# Altium PCB PCB2.PcbDoc
Units mm, origin at the board's own origin, x right, y up, seen from the top; angles counter-clockwise.
Board outline 92.48 x 112 mm, 2 copper layers (Top Layer, Bottom Layer); 8 components, 6 nets, 40 pads, 28 vias.
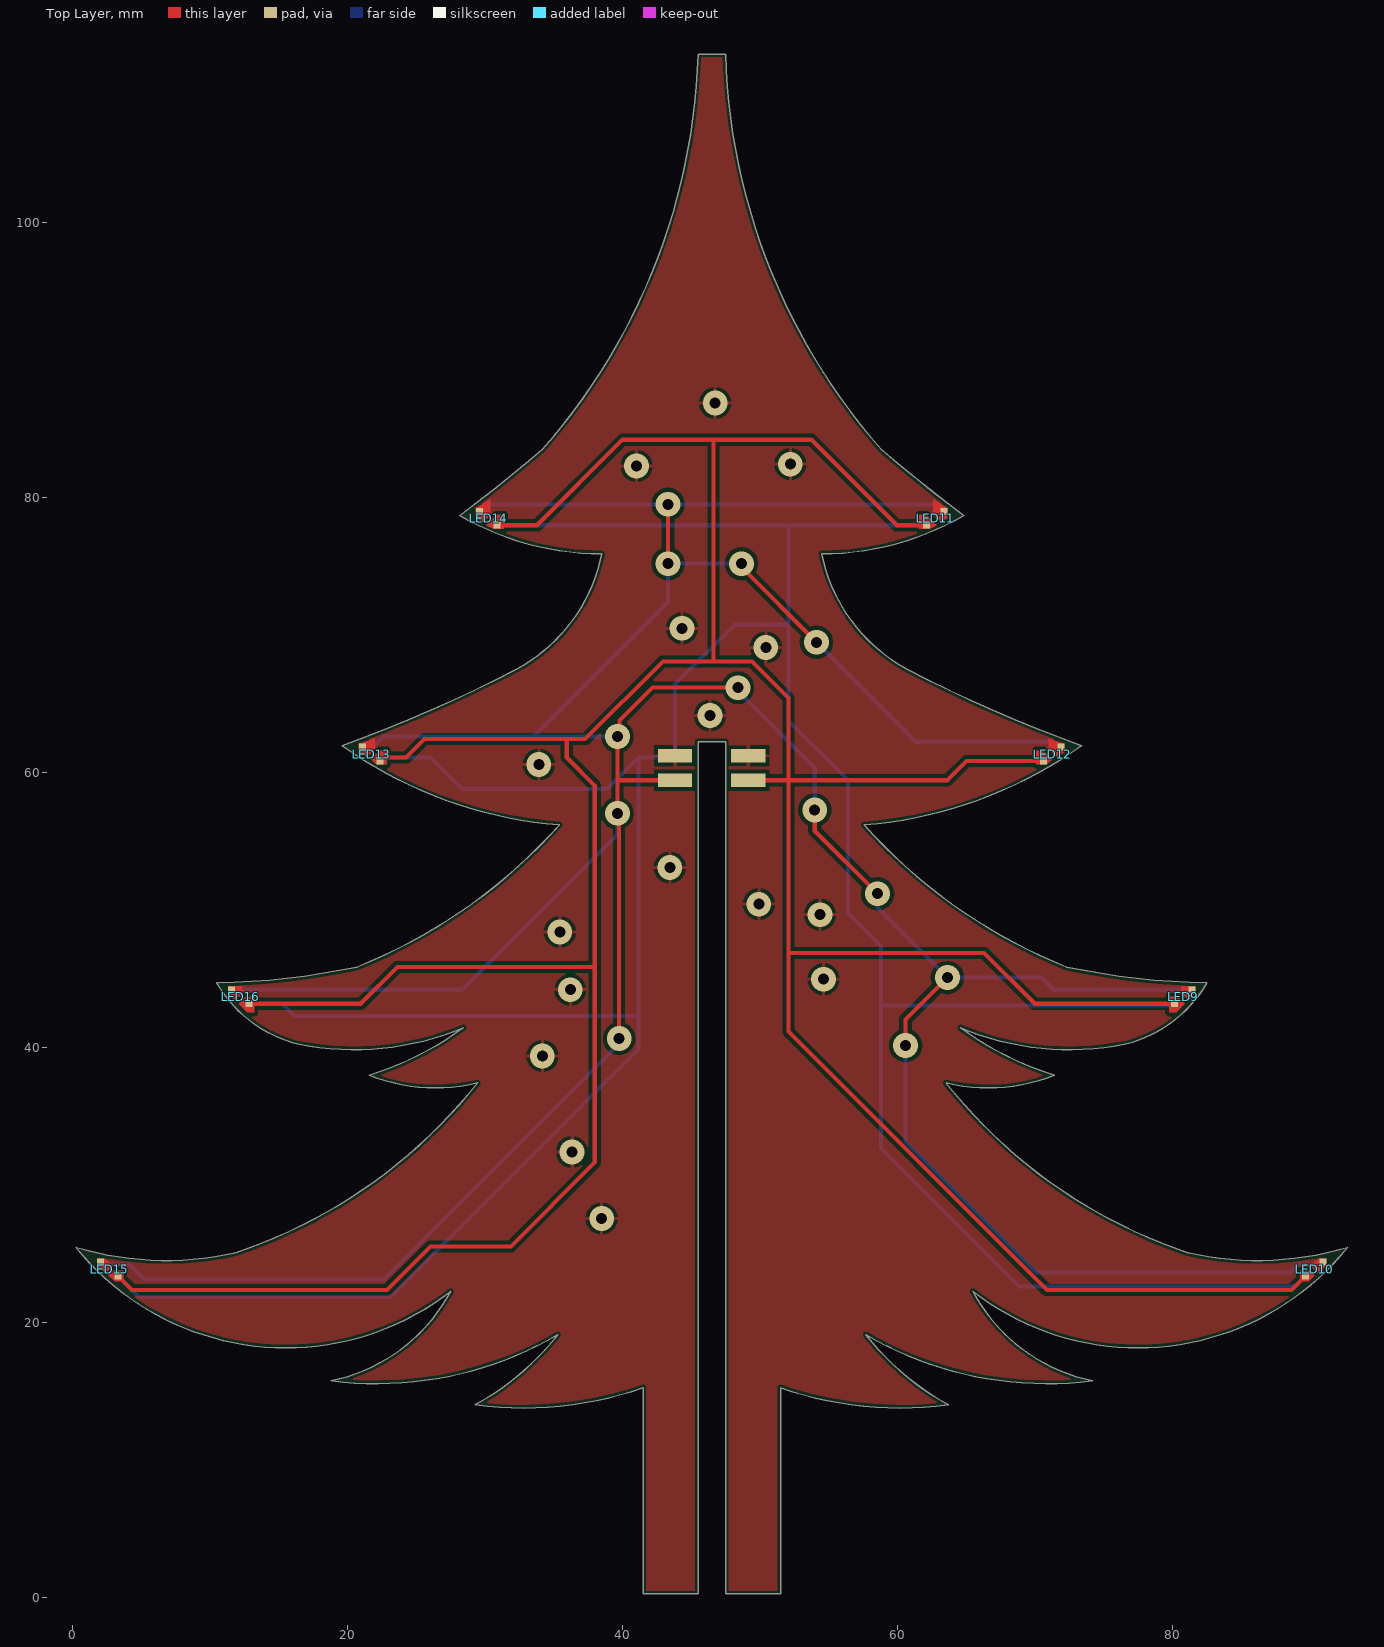
[diagram p0: Top Layer view]
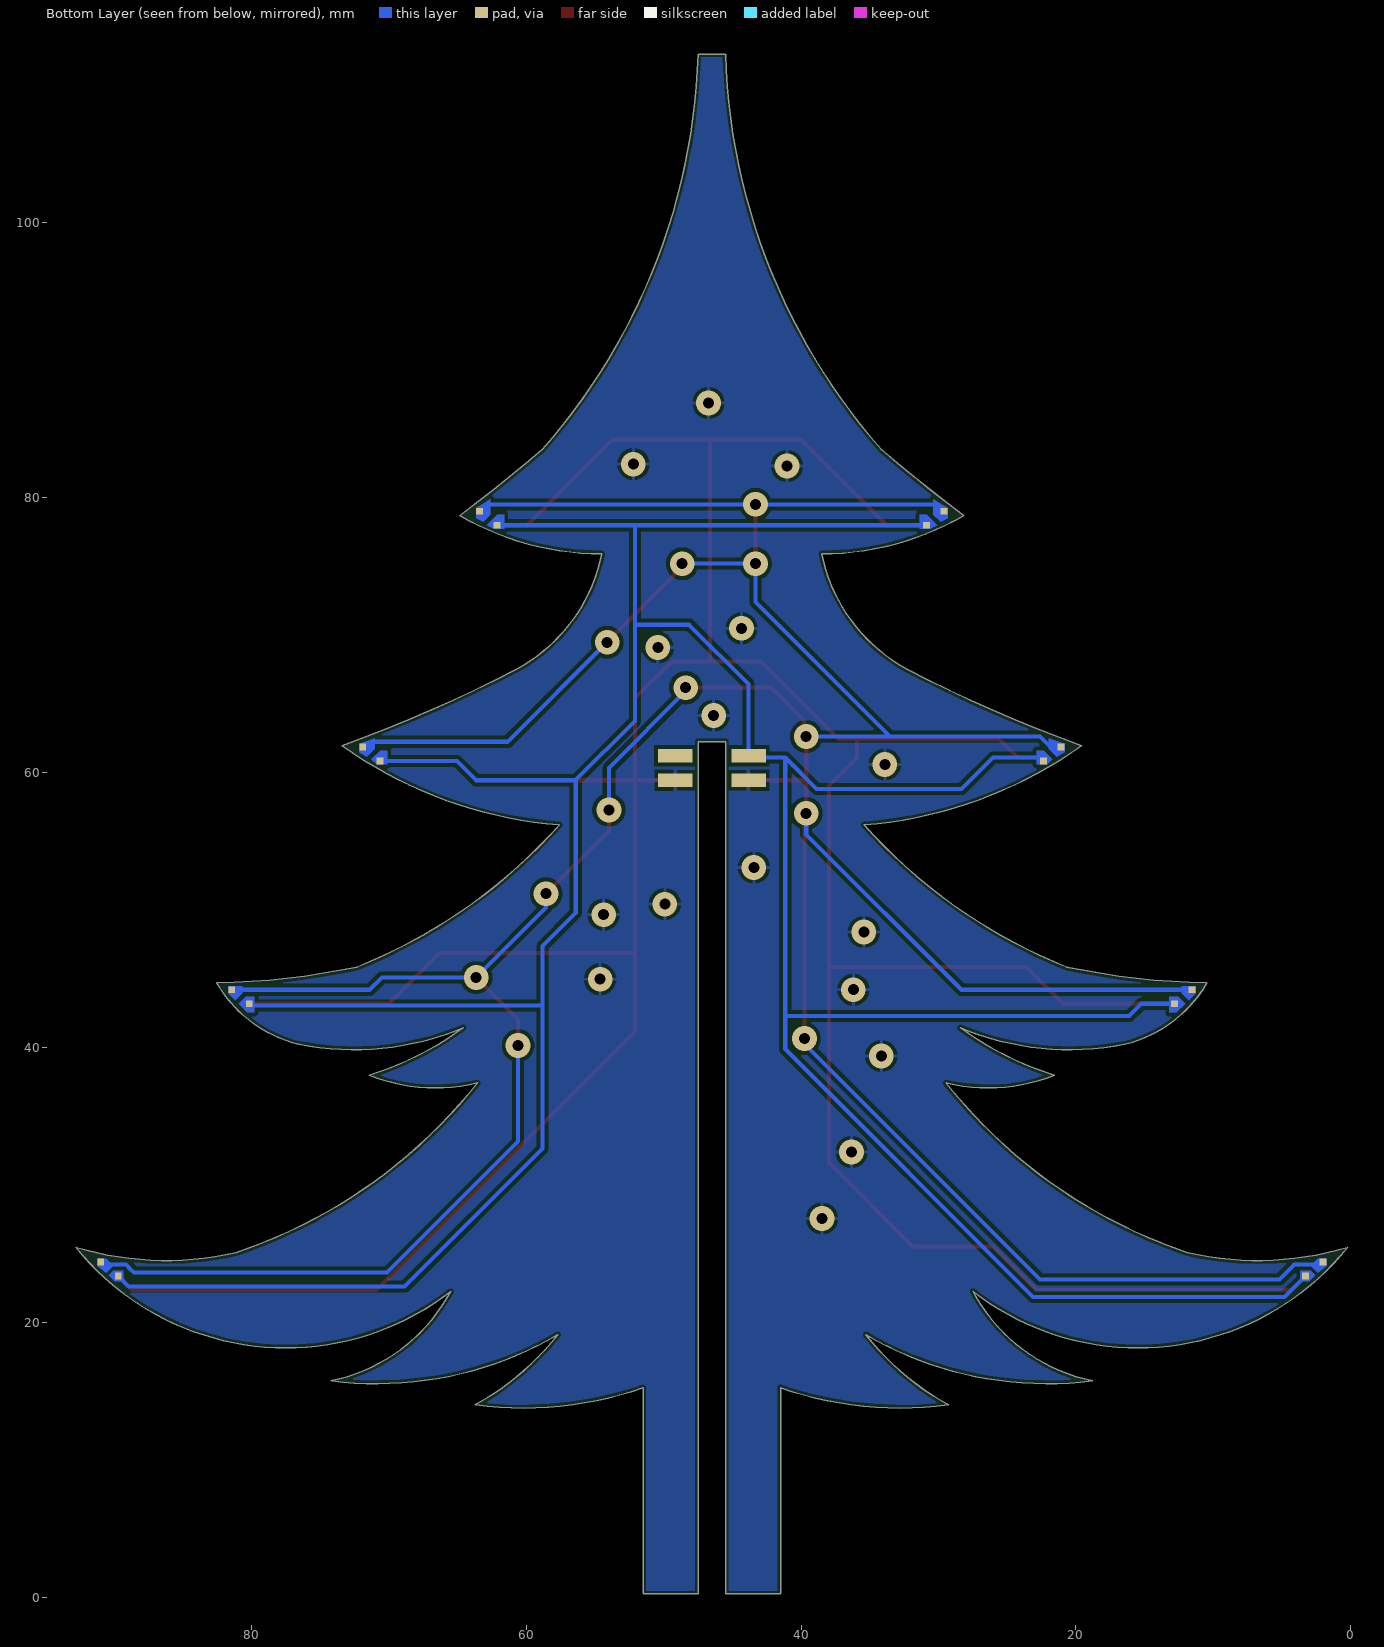
[diagram p1: Bottom Layer view, seen from below]

## Layer stack, top to bottom
Top Solder: solder mask 0.0102, Solder Resist, Dk 3.5
Top Layer: signal copper 0.0356
Dielectric 1: dielectric 0.32, FR-4, Dk 4.8
Bottom Layer: signal copper 0.0356
Bottom Solder: solder mask 0.0102, Solder Resist, Dk 3.5

## Board outline
0.25,25.447 ccw(c15.498,37.72) 27.489,22.25 cw(c16.226,28.246) 18.796,15.748 ccw(c22.107,41.683) 35.283,19.1 cw(c19.672,31.397) 29.274,13.998 ccw(c32.778,40.023) 41.489,15.25 41.489,0.25 45.489,0.25 45.489,62.25 47.489,62.25 47.489,0.25 51.489,0.25 51.489,15.25 ccw(c60.2,40.023) 63.705,13.998 cw(c73.306,31.397) 57.695,19.1 ccw(c70.872,41.683) 74.182,15.748 cw(c76.752,28.246) 65.489,22.25 ccw(c77.481,37.72) 92.728,25.447 cw(c86.204,47.36) 81.094,25.074 cw(c93.095,60.815) 63.53,37.42 ccw(c66.581,50.077) 71.408,37.985 cw(c78.121,59.804) 64.567,41.435 ccw(c72.507,60.239) 76.496,40.221 ccw(c74.275,49.473) 82.498,44.687 cw(c83.69,100.647) 72.293,45.847 cw(c86.914,82.315) 57.574,56.183 ccw(c55.084,87.548) 73.382,61.953 cw(c108.223,158.773) 60.7,67.506 cw(c66.556,78.334) 54.49,75.898 ccw(c54.435,96.629) 64.814,78.684 cw(c135.275,172.701) 58.825,83.486 cw(c92.91,113.534) 47.489,112.25 45.489,112.25 cw(c0.068,113.534) 34.154,83.486 cw(c-42.296,172.7) 28.164,78.684 ccw(c38.543,96.629) 38.488,75.898 cw(c26.422,78.334) 32.278,67.506 cw(c-15.244,158.773) 19.596,61.953 ccw(c37.894,87.548) 35.405,56.183 cw(c6.064,82.315) 20.685,45.847 cw(c9.289,100.646) 10.48,44.687 ccw(c18.703,49.473) 16.482,40.221 ccw(c20.471,60.239) 28.411,41.435 cw(c14.857,59.803) 21.571,37.985 ccw(c26.398,50.077) 29.448,37.42 cw(c-0.116,60.815) 11.884,25.074 cw(c6.774,47.36)

## Design rules (kind name [scope] priority, off if disabled: settings)
BoardOutlineClearance [All] p1: gap=0.24 ignorepadtopadclearanceinfootprint=FALSE
Clearance [All] p1: gap=0.3 ignorepadtopadclearanceinfootprint=FALSE
PolygonConnect [All] p1: connectstyle=Relief reliefconductorwidth=0.254 reliefentries=4 polygonreliefangle="90 Angle" airgapwidth=0.254
RoutingVias [All] p1: holewidth=0.8 width=1.8 viastyle="Through Hole" minholewidth=0.8 minwidth=1.8 maxholewidth=0.8 maxwidth=1.8
SolderMaskExpansion [All] p1: expansion=0.102 istentingtop=FALSE
Width [All] p1: maxlimit=1 minlimit=0.3 preferedwidth=0.5
30 further rules are at their usual default settings.

## Components (designator, comment, footprint, x,y, rotation, side; value= is the part's Value field where it differs from the comment)
LED9 "1010" LED_RGB_2_LAYERS#1 81.407,44.196 r180 top
LED10 "1010" LED_RGB_2_LAYERS#1 90.932,24.384 r180 top
LED11 "1010" LED_RGB_2_LAYERS#1 63.373,78.994 r180 top
LED12 "1010" LED_RGB_2_LAYERS#1 71.882,61.849 r180 top
LED13 "1010" LED_RGB_2_LAYERS#2 21.082,61.849 r0 top
LED14 "1010" LED_RGB_2_LAYERS#2 29.591,78.994 r0 top
LED15 "1010" LED_RGB_2_LAYERS#2 2.032,24.384 r0 top
LED16 "1010" LED_RGB_2_LAYERS#2 11.557,44.196 r0 top

## Footprints (in the part's own frame and the unit in brackets; to place one, negate y for a bottom-side part, rotate by r counter-clockwise, add the part's x,y. Pads: shape width x height; smd on the part's side, far side on the other; paste and mask are expansions set on the pad)
LED_RGB_2_LAYERS#1 [mm]
  rect 0.5x0.5 smd: 1(0,0) 2(1.27,1.016)
  rect 0.5x0.5 smd far side: 3(0,0) 4(1.27,1.016)
LED_RGB_2_LAYERS#2 [mm]
  rect 0.5x0.5 smd: 1(0,0) 2(1.27,-1.016)
  rect 0.5x0.5 smd far side: 3(0,0) 4(1.27,-1.016)

## Part data
LED9 LED10 LED11 LED12 LED13 LED14 LED15 LED16: library part LED-RGB, Name=1010

## Free pads (board coordinates)
  rect 2.5x1 smd: ""(43.815,59.436) ""(43.815,61.214) ""(49.149,59.436) ""(49.149,61.214)
  rect 2.5x1 smd far side: ""(43.815,59.436) ""(43.815,61.214) ""(49.149,59.436) ""(49.149,61.214)

## Via types
v1: diameter 1.8, hole 0.8, Top Layer to Bottom Layer, 28 vias

## Nets (pads, with @x,y where several pads share a name; then routed paths per layer and width w, separated by ;. In a path a pad name is that pad's centre, name@x,y a point inside that pad or via, vN(x,y) a via of type N, cw(c..) or ccw(c..) an arc to the next point about the centre after c; other vN are vias at no path point)
+5V: LED9.1 LED10.1 LED11.1 LED12.1 LED13.1 LED14.1 LED15.1 LED16.1 pad.@43.815,59.436 pad.@43.815,61.214 pad.@49.149,59.436 pad.@49.149,61.214
  other v1: 38.481,27.559 36.322,32.385 34.163,39.37 36.195,44.196 54.61,44.958 35.433,48.387 54.356,49.657 49.911,50.419 43.434,53.086 33.909,60.579 46.355,64.135 50.419,69.088 44.323,70.485 41.021,82.296 52.197,82.423 46.736,86.868
BLUE: LED9.4 LED10.4 LED11.4 LED12.4 LED13.4 LED14.4 LED15.4 LED16.4 pad.@43.815,61.214 | length 285.5
  Bottom Layer w0.3: LED15.4 4.826,21.844 23.114,21.844 41.148,39.878 41.148,42.291 ; LED16.4 15.24,43.18 16.129,42.291 41.148,42.291 ; 22.479,61.087 26.035,61.087 28.321,58.801 38.862,58.801 41.148,61.087 ; LED14.4 52.07,77.978 ; LED11.4 52.07,77.978 ; LED12.4 65.024,60.833 63.627,59.436 56.388,59.436 ; 80.391,43.053 58.801,43.053 ; LED10.4 88.9,22.606 68.834,22.606 58.801,32.639 58.801,43.053 ; 41.148,42.291 41.148,61.087 ; 41.148,61.087 43.688,61.087 43.815,61.214 43.815,66.421 48.133,70.739 52.07,70.739 ; 52.07,70.739 52.07,63.754 56.388,59.436 ; 52.07,70.739 52.07,77.978 ; 56.388,59.436 56.388,49.784 58.801,47.371 58.801,43.053
GND: 
GREEN: LED9.2 LED10.2 LED11.2 LED12.2 LED13.2 LED14.2 LED15.2 LED16.2 pad.@49.149,59.436 | length 304.6
  Top Layer w0.3: LED15.2 4.318,22.352 22.86,22.352 26.035,25.527 31.877,25.527 37.973,31.623 37.973,45.847 ; LED16.2 20.955,43.18 23.622,45.847 37.973,45.847 ; 22.479,61.087 24.257,61.087 25.59,62.42 35.941,62.42 ; LED14.2 33.782,77.978 40.005,84.201 46.609,84.201 ; pad.@49.149,59.436 52.07,59.436 ; LED11.2 59.944,77.978 53.721,84.201 46.609,84.201 ; LED12.2 65.024,60.833 63.627,59.436 52.07,59.436 ; LED9.2 69.977,43.18 66.294,46.863 52.07,46.863 ; LED10.2 88.646,22.352 70.866,22.352 52.07,41.148 52.07,46.863 ; 35.941,62.42 37.274,62.42 42.926,68.072 46.609,68.072 ; 35.941,62.42 35.941,61.087 37.973,59.055 37.973,45.847 ; 46.609,68.072 49.403,68.072 52.07,65.405 52.07,59.436 ; 46.609,68.072 46.609,84.201 ; 52.07,46.863 52.07,59.436
RED: LED9.3 LED10.3 LED11.3 LED12.3 LED13.3 LED14.3 LED15.3 LED16.3 pad.@43.815,59.436 | length 318.3
  Top Layer w0.3: v1(39.751,40.64) 39.751,56.896 v1(39.624,57.023) 39.624,59.436 ; v1(43.307,75.184) v1(43.307,79.502) ; pad.@43.815,59.436 39.624,59.436 ; v1(48.387,66.167) 42.164,66.167 39.771,63.774 39.771,62.758 v1(39.624,62.611) 39.624,59.436 ; v1(48.641,75.184) 48.641,74.93 v1(54.102,69.469) ; v1(53.975,57.277) 53.975,55.753 v1(58.547,51.181) ; v1(60.579,40.132) 60.579,42.037 v1(63.627,45.085)
  Bottom Layer w0.3: LED15.3 2.132,24.284 2.259,24.284 2.415,24.128 2.664,24.128 2.735,24.199 4.122,24.199 5.207,23.114 22.606,23.114 39.751,40.259 v1(39.751,40.64) ; LED16.3 28.321,44.196 39.624,55.499 v1(39.624,57.023) ; LED13.3 21.844,61.849 22.606,62.611 33.528,62.611 ; LED14.3 30.099,79.502 v1(43.307,79.502) 62.611,79.502 63.119,78.994 ; v1(39.624,62.611) 33.528,62.611 ; v1(48.387,66.167) 48.387,65.913 53.975,60.325 v1(53.975,57.277) ; v1(48.641,75.184) v1(43.307,75.184) 43.307,72.39 33.528,62.611 ; v1(54.102,69.469) 61.341,62.23 64.135,62.23 64.138,62.233 64.386,62.233 64.389,62.23 71.247,62.23 71.628,61.849 ; v1(58.547,51.181) 58.547,50.165 v1(63.627,45.085) 70.485,45.085 71.374,44.196 LED9.3 ; v1(60.579,40.132) 60.579,33.147 70.104,23.622 83.693,23.622 83.696,23.625 83.944,23.625 83.947,23.622 88.519,23.622 88.831,23.934 88.831,23.935 89.095,24.199 90.229,24.199 90.298,24.13 90.678,24.13 LED10.3
STAR: pad.@49.149,61.214

## Polygon pours and split planes (outlines as drawn)
+5V on Bottom Layer "+5V_L02_P001" (solid, pour order 1): 0,0 0,112.25 92.728,112.25 92.728,0
+5V on Top Layer "+5V_L01_P000" (solid, pour order 0): 0,0 0,112.25 92.728,112.25 92.728,0

## Other copper
Top Layer:
  region net +5V: 81.661,44.45 81.661,43.942 81.165,43.446 80.645,43.942 80.645,44.45 80.899,44.45
  region net +5V: 91.186,24.638 91.186,24.13 90.551,23.622 90.043,24.13 90.551,24.638
  region net GREEN: 71.247,60.96 70.866,60.579 70.104,60.579 70.104,61.595 70.612,61.595
  region net GREEN: 90.361,23.431 89.916,22.987 89.281,22.987 89.281,23.749 90.043,23.749
  region net GREEN: 62.865,77.978 62.357,77.724 61.595,77.724 61.595,78.74 62.103,78.74
  region net +5V: 63.627,79.248 63.627,78.486 63.113,78.226 62.6,78.74 62.6,79.864 62.992,79.629
  region net +5V: 72.136,62.103 72.136,61.468 71.58,61.135 70.993,61.722 70.993,62.484 71.374,62.357
  region net GREEN: 80.899,43.18 80.264,42.545 79.756,42.545 79.756,43.688 80.391,43.688
  region net GREEN: 21.717,60.96 22.098,60.579 22.86,60.579 22.86,61.595 22.352,61.595
  region net GREEN: 2.603,23.431 3.048,22.987 3.683,22.987 3.683,23.749 2.921,23.749
  region net +5V: 1.778,24.638 1.778,24.13 2.413,23.622 2.921,24.13 2.413,24.638
  region net GREEN: 30.099,77.978 30.607,77.724 31.369,77.724 31.369,78.74 30.861,78.74
  region net +5V: 29.337,79.248 29.337,78.486 29.851,78.226 30.364,78.74 30.364,79.864 29.972,79.629
  region net +5V: 20.828,62.103 20.828,61.468 21.384,61.135 21.971,61.722 21.971,62.484 21.59,62.357
  region net +5V: 11.303,44.45 11.303,43.942 11.799,43.446 12.319,43.942 12.319,44.45 12.065,44.45
  region net GREEN: 12.065,43.18 12.7,42.545 13.208,42.545 13.208,43.688 12.573,43.688
Bottom Layer:
  region net RED: 81.661,44.45 81.661,43.942 81.165,43.446 80.645,43.942 80.645,44.45 80.899,44.45
  region net RED: 91.186,24.638 91.186,24.13 90.551,23.622 90.043,24.13 90.551,24.638
  region net RED: 63.627,79.248 63.627,78.486 63.113,78.226 62.6,78.74 62.6,79.864 62.992,79.629
  region net BLUE: 80.899,43.18 80.264,42.545 79.756,42.545 79.756,43.688 80.391,43.688
  region net RED: 72.136,62.103 72.136,61.468 71.58,61.135 70.993,61.722 70.993,62.484 71.374,62.357
  region net BLUE: 62.865,77.978 62.357,77.724 61.595,77.724 61.595,78.74 62.103,78.74
  region net BLUE: 71.247,60.96 70.866,60.579 70.104,60.579 70.104,61.595 70.612,61.595
  region net BLUE: 90.361,23.431 89.916,22.987 89.281,22.987 89.281,23.749 90.043,23.749
  region net BLUE: 2.603,23.431 3.048,22.987 3.683,22.987 3.683,23.749 2.921,23.749
  region net RED: 11.303,44.45 11.303,43.942 11.799,43.446 12.319,43.942 12.319,44.45 12.065,44.45
  region net RED: 1.778,24.638 1.778,24.13 2.413,23.622 2.921,24.13 2.413,24.638
  region net RED: 29.337,79.248 29.337,78.486 29.851,78.226 30.364,78.74 30.364,79.864 29.972,79.629
  region net BLUE: 30.099,77.978 30.607,77.724 31.369,77.724 31.369,78.74 30.861,78.74
  region net BLUE: 12.065,43.18 12.7,42.545 13.208,42.545 13.208,43.688 12.573,43.688
  region net RED: 20.828,62.103 20.828,61.468 21.384,61.135 21.971,61.722 21.971,62.484 21.59,62.357
  region net BLUE: 21.717,60.96 22.098,60.579 22.86,60.579 22.86,61.595 22.352,61.595

## Silkscreen, mask and mechanical layers (free items; w line width, h text height)
Board:
  lines w0.48: 0.25,25.447 ccw(c6.774,47.36) 11.884,25.074 ccw(c-0.116,60.815) 29.448,37.42 cw(c26.398,50.077) 21.571,37.985 ccw(c14.857,59.803) 28.411,41.435 cw(c20.471,60.239) 16.482,40.221 cw(c18.703,49.473) 10.48,44.687 ccw(c9.289,100.646) 20.685,45.847 ccw(c6.064,82.315) 35.404,56.183 cw(c37.894,87.548) 19.596,61.953 ccw(c-15.244,158.773) 32.278,67.506 ccw(c26.422,78.334) 38.488,75.898 cw(c38.543,96.629) 28.164,78.684 ccw(c-42.297,172.7) 34.154,83.486 ccw(c0.068,113.534) 45.489,112.25 47.489,112.25 ccw(c92.91,113.534) 58.825,83.486 ccw(c135.275,172.7) 64.814,78.684 cw(c54.435,96.629) 54.49,75.898 ccw(c66.556,78.334) 60.7,67.506 ccw(c108.223,158.773) 73.382,61.953 cw(c55.084,87.548) 57.574,56.183 ccw(c86.914,82.315) 72.293,45.847 ccw(c83.689,100.646) 82.498,44.687 cw(c74.275,49.473) 76.496,40.221 cw(c72.507,60.239) 64.567,41.435 ccw(c78.121,59.803) 71.408,37.985 cw(c66.581,50.077) 63.53,37.42 ccw(c93.095,60.815) 81.094,25.074 ccw(c86.204,47.36) 92.728,25.447 cw(c77.481,37.72) 65.489,22.25 ccw(c76.752,28.246) 74.182,15.748 cw(c70.871,41.683) 57.695,19.1 ccw(c73.306,31.397) 63.705,13.998 cw(c60.2,40.023) 51.489,15.25 51.489,0.25 47.489,0.25 47.489,62.25 45.489,62.25 45.489,0.25 41.489,0.25 41.489,15.25 cw(c32.778,40.023) 29.274,13.998 ccw(c19.672,31.397) 35.283,19.1 cw(c22.107,41.683) 18.796,15.748 ccw(c16.226,28.246) 27.489,22.25 cw(c15.498,37.72) 0.25,25.447
  lines w1.27: 202.565,164.211 202.692,164.084